# Allegro board SAPD2.brd
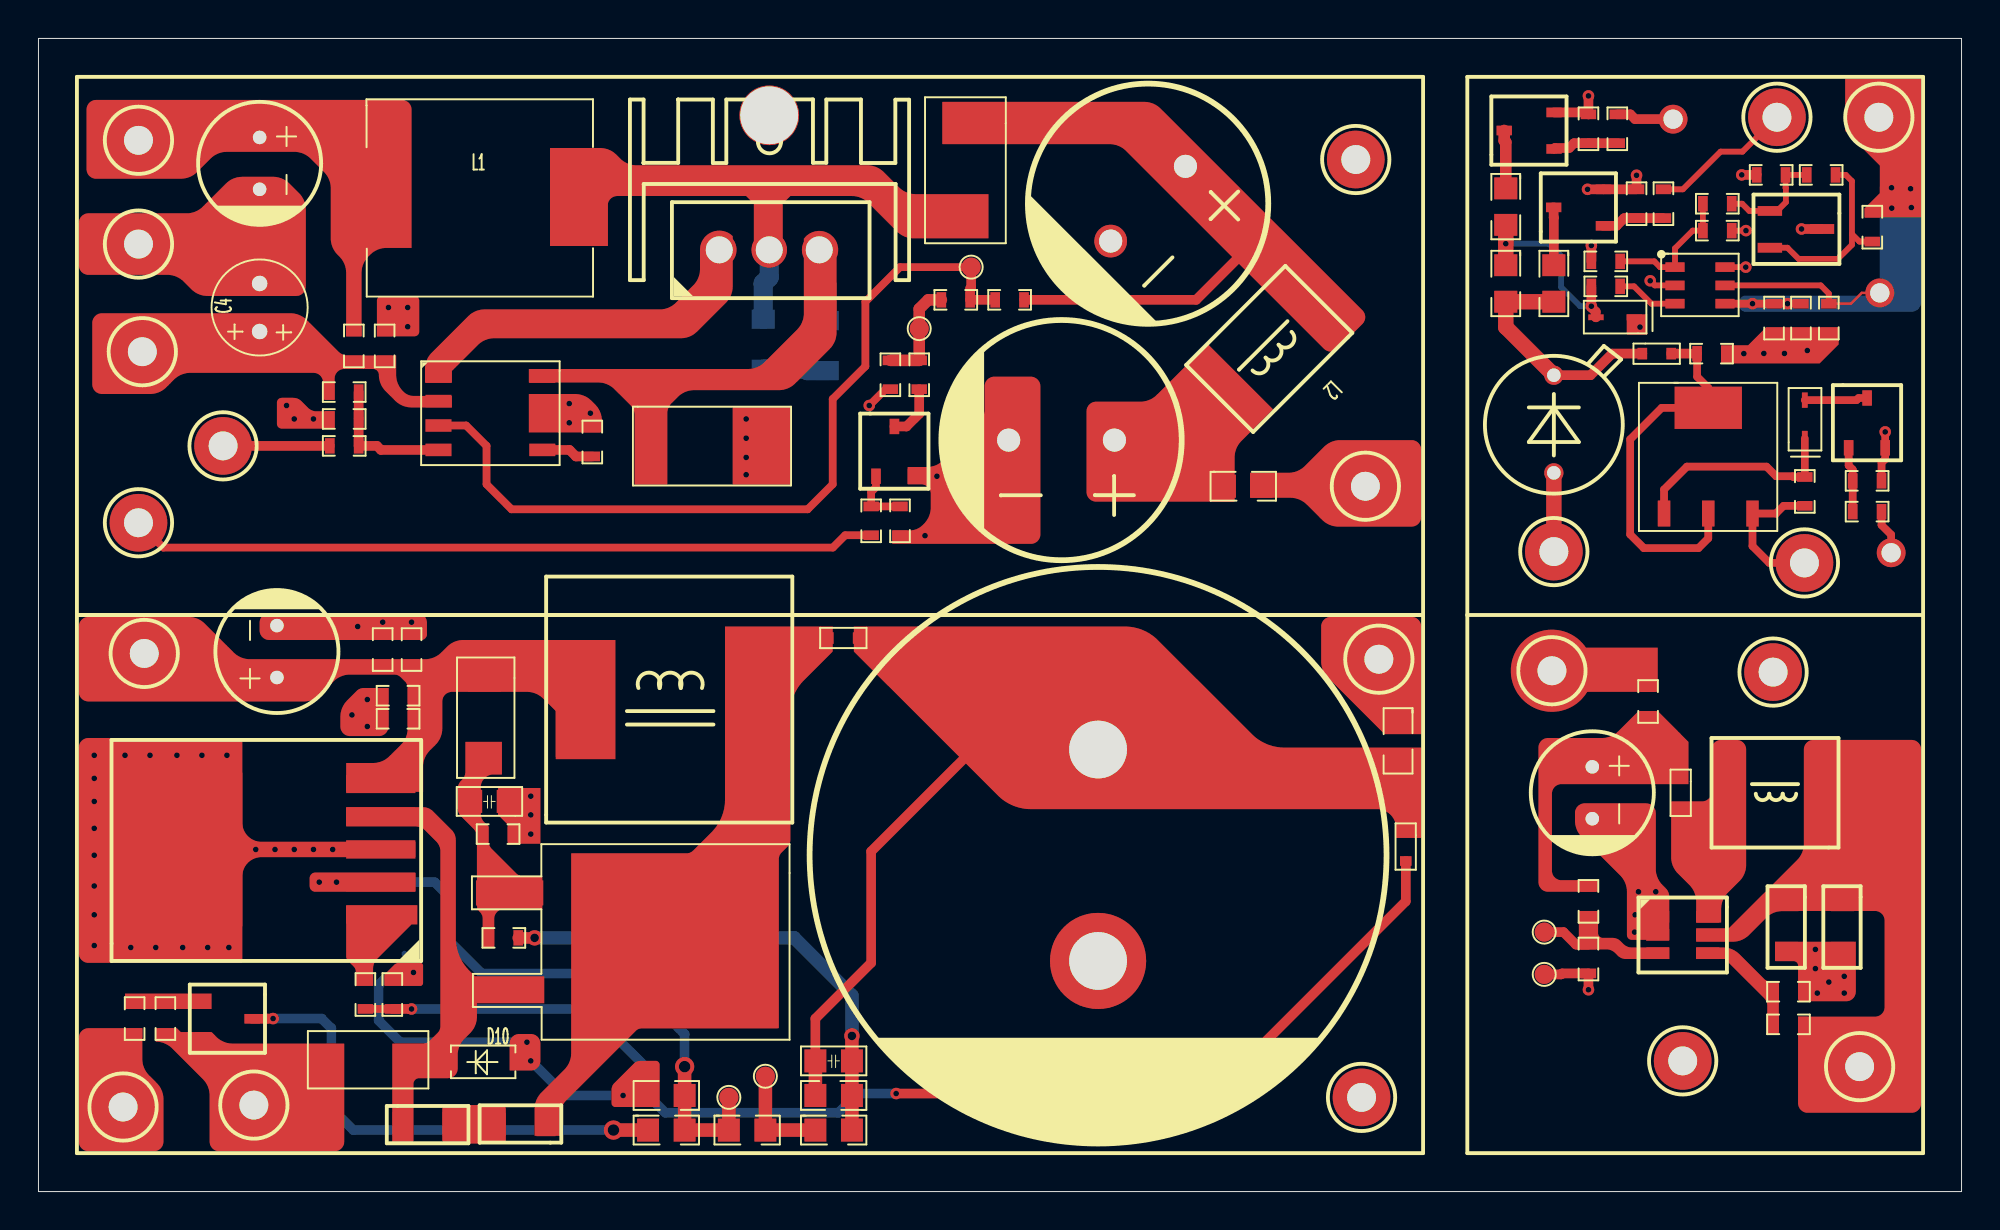
[diagram p0: board, top side]
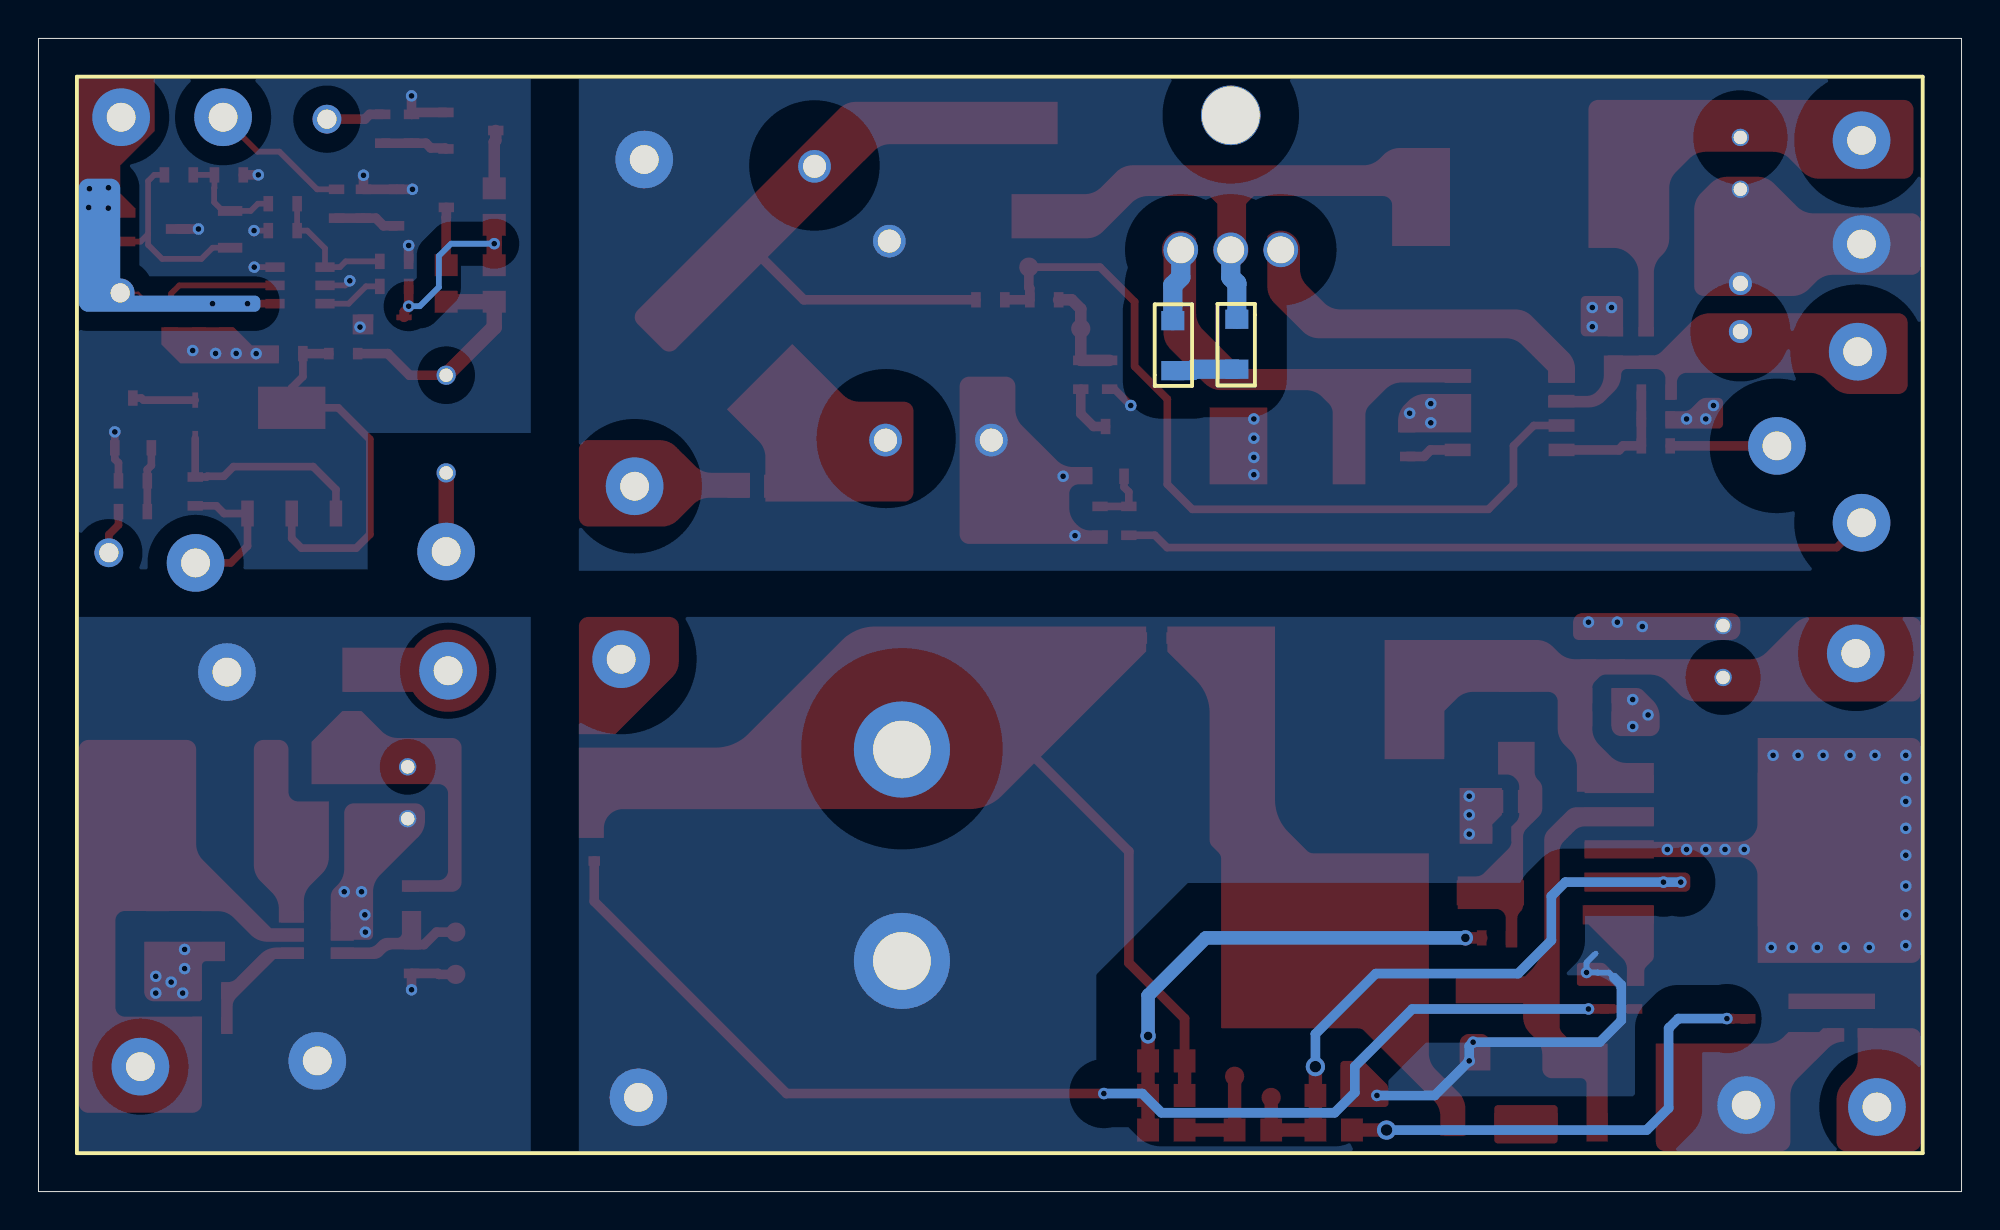
[diagram p1: board, bottom side, seen from below]

Outline 100 x 60 mm; copper layers: TOP, BOTTOM. Coordinates in mm from the lower left corner of the outline.
Outline path: 0,60 0,0 100,0 100,60 0,60

## Design rules (mm)
constraint set DEFAULT: min track width 0.127

## Placement (name value [footprint] x y rotation side)
C1  100uF/35V  [THR-CAP-6D3X11MM]  11.5 53.5 270 top
C2  22uF/250V  [CAP-D12D5XL16MM]  57.7 51.4 225 top
C3  0.1uF/16V  [C0603]  82.3 48.8 180 top
C4  10uF/35V  [CAP-D5XL11MM]  11.5 46 90 top
C5  0.1uF/16V  [C0603]  89.85 46.25 270 top
C6  10uF/16V  [C0603]  91.25 46.25 270 top
C7  0.1uF/35V  [C0603]  18.4 43.2 90 top
C8  22uF/250V  [CAP-D12D5XL16MM]  53.2 39.1 180 top
C9  0.1uF/35V  [C0603]  29.2 38.2 90 top
C10  0.1uF/35V  [C0603]  17.5 29 270 top
C11  1uF/35V  [C0603]  19.8 27.4 90 top
C12  100uF/35V  [THR-CAP-6D3X11MM]  12.4 28.1 90 top
C13  2.2uF/25V  [C0603]  19.5 26.2 180 top
C14  0.1uF/25V  [C0603]  17.9 24.2 0 top
C15  100uF/35V  [THR-CAP-6D3X11MM]  80.8 20.75 270 top
C16  10uF/35V  [C0805]  24.5 20.9 180 top
C17  0.1uF/35V  [C0603]  24.7 19 180 top
C18  1000uF/250V  [THR-CAP-D30XL40MM]  55.1 17.5 270 top
C19  10uF/35V  [C1210]  90.9 13.8 270 top
C20  10uF/35V  [C1210]  93.8 13.8 270 top
C21  1uF/35V  [C0603]  18.8 9.45 90 top
C22  DNP  [C0805]  42.4 7.4 180 top
C23  DNP  [R1210]  20.2 3.5 0 top
C24  DNP  [R1210]  41 44.01 90 bottom
D1  ES2F  [DO-214AA]  48.2 55.6 270 top
D2  PTVSLC3D3V3B  [SOD-323]  82 45.5 180 top
D3  BAS521  [SOD523]  83.4 43.6 0 top
D4  SAPD  [SAPD-THR-2P]  78.8 39.9 90 top
D5  BAS521  [SOD523]  42.6 28.8 180 top
D6  SS16  [DO-214AC]  23.2 24.7 270 top
D7  BAS521-7  [SOD523]  85.4 21.5 270 top
D8  BAS521  [SOD523]  71.1 18.7 270 top
D9  SS16  [DO-214AC]  17.1 6.8 0 top
D10  BZT52C30  [SOD123]  21.2 5.9 0 top
D11  MM3Z12VT1G  [SOD-323]  91.86 40.17 90 top
L1  100uH/2A  [IND-11D5X10X5MM]  17.8 51.7 0 top
L2  10uH/500mA  [SMD-6D8X4D5X3MM]  65.8 45.7 225 top
L3  33uH/3A  [SMD-CAP-12X12X8MM]  38.8 19.6 90 top
L4  47uH/1A  [SMD-IND-5X5MM]  90.3 20.7 180 top
NOREF  -  [unnamed]  38 56 0 top
NOREF#2  -  [#2]  0 60 0 top
NOREF#3  -  [#2]  0 0 90 top
Q1  FH3400C  [SOT-23]  77.53 55.2 90 top
Q2  IRF644PbF  [TO-220AB]  35.4 49 0 top
Q3  FH3400C  [SOT-23]  80.1 51.2 90 top
Q5  FH3400C  [SOT-23]  95.08 39.98 0 top
Q6  FH3400C  [SOT-23]  44.5 38.5 0 top
Q7  IRF840ASPbF  [D2PARK]  33.1 13 270 top
Q8  FH3400C  [SOT-23]  9.8 9 270 top
Q9  BSP316P  [SOT-223-3]  83.53 36.28 0 top
R1  10K  [R0603]  81 54.5 90 top
R2  100  [R0603]  81.7 56.1 270 top
R3  DNP  [R0603]  90.9 53.3 180 top
R4  0  [R0603]  93.5 53.3 180 top
R5  10K  [R0603]  83.5 50.6 90 top
R6  100  [R0603]  84.1 52.2 270 top
R7  4.99K  [R0603]  88.1 51.8 180 top
R8  4.7K  [R0805]  75.7 52.3 270 top
R9  499  [R0603]  94.96 50.98 270 top
R10  682  [R0603]  86.5 49.6 0 top
R11  332K  [R0805]  75.7 48.3 270 top
R12  0  [R0805]  78.2 48.3 270 top
R13  1K  [R0603]  82.3 47.5 180 top
R14  0  [R0603]  48.5 46.8 180 top
R15  1.5M  [R0603]  51.3 46.8 180 top
R16  10K  [R0603]  92.7 46.25 270 top
R17  DNP  [R0603]  16 44.8 270 top
R18  1M  [R0603]  87.8 44 180 top
R19  10K  [R0603]  43.9 43.3 270 top
R20  DNP  [R0603]  45.4 43.3 270 top
R21  DNP  [R0603]  15.1 41.2 0 top
R22  10K  [R0603]  92.25 35.63 90 top
R23  0  [R0603]  15.1 39.8 0 top
R24  DNP  [R0603]  15.1 38.4 0 top
R25  50m  [R2512]  31.9 38.8 0 top
R26  10K  [R0603]  94.29 36.58 0 top
R27  0  [R0805]  61.6 36.1 0 top
R28  100  [R0603]  95.89 35.78 180 top
R29  1K  [R0603]  43.7 34.1 90 top
R30  10K  [R0603]  44.4 35.7 270 top
R31  0  [R0603]  84.1 24.7 90 top
R32  300  [R0805]  70.1 24.5 270 top
R33  182K  [R0603]  80.2 15.9 270 top
R34  100K  [R0603]  25 13.6 180 top
R35  10K  [R0603]  80.2 12.9 270 top
R36  DNP  [R0603]  91.8 10.8 180 top
R37  1K  [R0603]  17.4 9.45 90 top
R38  1K  [R0603]  5.4 8.2 90 top
R39  10K  [R0603]  6.2 9.8 270 top
R40  10K  [R0603]  91.8 9.1 180 top
R41  5.36K  [R0805]  31.6 4.4 0 top
R42  1M  [R0805]  42.4 5.6 180 top
R43  DNP  [R1210]  25.1 3.5 180 top
R44  DNP  [R0805]  31.6 2.6 0 top
R45  0  [R0805]  35.8 2.6 0 top
R46  49.9K  [R0805]  40.3 2.6 0 top
R47  DNP  [R1210]  37.7 44.1 270 bottom
TP1  RESET  [TP_THR_CIR_3D0_1D5]  90.4 55.9 0 top
TP2  VDD5X  [TP_THR_CIR_3D0_1D5]  95.7 55.9 0 top
TP3  MODE  [TP_THR_CIR_1D0_1D5]  85 55.8 0 top
TP4  PWR_IN  [TP_THR_CIR_3D0_1D5]  5.2 54.7 0 top
TP5  HV1RET  [TP_THR_CIR_3D0_1D5]  68.5 53.7 0 top
TP6  GND  [TP_THR_CIR_3D0_1D5]  5.2 49.3 0 top
TP7  VR-1  [TP_SMD_1D0_NP]  48.5 48.1 0 top
TP8  VR-2  [TP_SMD_1D0_NP]  45.8 44.9 0 top
TP9  IC_PWR  [TP_THR_CIR_3D0_1D5]  5.4 43.7 0 top
TP10  SIGNAL  [TP_THR_CIR_1D0_1D5]  95.75 46.76 0 top
TP11  ENABLE  [TP_THR_CIR_3D0_1D5]  9.6 38.8 0 top
TP12  HV1  [TP_THR_CIR_3D0_1D5]  69 36.7 0 top
TP13  Vquench  [TP_THR_CIR_3D0_1D5]  91.83 32.71 0 top
TP14  LM_EN1  [TP_THR_CIR_3D0_1D5]  5.2 34.8 0 top
TP15  HVPS  [TP_THR_CIR_3D0_1D5]  78.8 33.3 0 top
TP16  QUENCH  [TP_THR_CIR_1D0_1D5]  96.34 33.24 0 top
TP17  VDDX  [TP_THR_CIR_3D0_1D5]  5.5 28 0 top
TP18  HV2  [TP_THR_CIR_3D0_1D5]  69.7 27.7 0 top
TP19  GND  [TP_THR_CIR_3D0_1D5]  90.2 27.03 0 top
TP20  Vquench  [TP_THR_CIR_3D0_1D5]  78.7 27.1 0 top
TP21  VR-1  [TP_SMD_1D0_NP]  78.3 13.5 0 top
TP22  VR-2  [TP_SMD_1D0_NP]  78.3 11.3 0 top
TP23  GND  [TP_THR_CIR_3D0_1D5]  85.5 6.8 0 top
TP24  5V~11V  [TP_THR_CIR_3D0_1D5]  94.7 6.5 0 top
TP25  VR-1  [TP_SMD_1D0_NP]  37.8 6 0 top
TP26  VR-2  [TP_SMD_1D0_NP]  35.9 4.9 0 top
TP27  GND  [TP_THR_CIR_3D0_1D5]  68.8 4.9 0 top
TP28  HV2RET  [TP_THR_CIR_3D0_1D5]  11.2 4.5 0 top
TP29  LM_EN2  [TP_THR_CIR_3D0_1D5]  4.4 4.4 0 top
U1  TL431  [SOT-23-3-TL431]  89.6 51.5 270 top
U2  TLV3501AIDBVR  [SOT-23-6]  85.1 48.1 0 top
U3  MAX1771ESA+  [SO-8]  26.2 42.4 270 top
U4  LT1172CQ#PBF  [DDPARK-5]  17.8 14.4 90 top
U5  MAX5026EUT-T  [SOT23-6]  85.5 13.4 270 top

## Library data of the parts
C1 C2 C8 C11-C13 C15 C18 C21 = C
C3-C7 C9 C10 C14 C16 C17 C19 C20 C22-C24 = CAP NP
D1 D3-D5 D7 D8 = DIODE
D2 = DIODE SCHOTTKY
D6 D9 = DIODE SCHOTTKY13_0
D10 D11 = DIODE ZENER
L1-L4 = INDUCTOR
Q1 Q3 Q5 Q6 Q8 = FH3400C
Q2 = IRF644PbF
Q7 = IRF840ASPbF
Q9 = BSP316P
R1-R47 = R
TP1-TP29 = T POINT F
U1 = TL431/TI
U2 = TLV3501AIDBVR
U3 = MAX1771ESA+
U4 = LT1172CQ#PBF
U5 = MAX5026EUT-T

## Footprints (pads in the part's own frame, mm; a bottom-side part is the same pattern mirrored in y, then rotated)
C0603
  rect 0.5x0.8 smd: 1(0.05,0.4) 2(1.55,0.4)
C0805
  rect 1.14x1.2 smd: 1(0.1,0.6) 2(2,0.6)
C1210
  rect 1x1.2 smd: 1(-1.289,0.015) 2(1.311,0.015)
CAP-D5XL11MM
  round 1.2 hole 0.8: 1(-1.25,0) 2(1.25,0)
CAP-D12D5XL16MM
  round 1.7 hole 1.2: 1(-2.75,0) 2(2.75,0)
D2PARK
  rect 1.3x3.5 smd: 1(-2.54,-8.6) 2(2.54,-8.6)
  rect 9x10.7 smd: 3(0,0)
DDPARK-5
  rect 0.95x3.6 smd: 1(0,0) 2(1.702,0) 3(3.404,0) 4(5.106,0) 5(6.808,0)
  rect 8x6 smd: 6(3.4,10.2)
DO-214AA
  rect 2.16x2.26 smd: 1(0,0) 2(4.9,0)
DO-214AC
  rect 1.575x1.67 smd: 1(-2.1,0) 2(2.17,-0.005)
IND-11D5X10X5MM
  rect 3x5 smd: 1(0,0) 2(10.3,0)
R0603
  rect 0.5x0.8 smd: 1(0.05,0.4) 2(1.55,0.4)
R0805
  rect 1.14x1.2 smd: 1(0.1,0.6) 2(2,0.6)
R1210
  rect 1x1.2 smd: 1(-1.289,0.015) 2(1.311,0.015)
R2512
  rect 1.5x3.7 smd: 1(0,0) 2(6.25,0)
SAPD-THR-2P
  round 1 hole 0.7: 1(-2.504,0) 2(2.576,0)
SMD-6D8X4D5X3MM
  rect 1x3 smd: 1(0,0) 2(5.2,0)
SMD-CAP-12X12X8MM
  rect 6x3 smd: 1(6,10.4) 2(6,1.6)
SMD-IND-5X5MM
  rect 1.25x4 smd: 1(-2.2,0) 2(2.2,0)
SO-8
  rect 0.65x1.35 smd: 1(0,-5.4) 2(1.27,-5.4) 3(2.54,-5.4) 4(3.81,-5.4) 5(3.81,0) 6(2.54,0) 7(1.27,0) 8(0,0)
SOD123
  rect 0.5x0.8 smd: 1(0.256,0.85) 2(3.614,0.85)
SOD523
  rect 0.5x0.6 smd: 1(0,0) 2(1.5,0)
SOD-323
  rect 0.8x0.3 smd: 1(-0.99,0.01) 2(1.01,0.01)
SOT23-6
  rect 0.6x1.2 smd: 1(-0.9,-1.3) 2(0.05,-1.3) 3(1,-1.3) 4(1,1.3) 5(0.05,1.3) 6(-0.9,1.3)
SOT-23
  rect 0.5x0.8 smd: 1(-0.95,-1.28) 2(0.95,-1.28) 3(0.01,1.31)
SOT-23-3-TL431
  rect 0.51x1.27 smd: 1(0.476,0.434) 2(1.415,3.142) 3(2.391,0.434)
SOT-23-6
  rect 1x0.5 smd: 1(0,0) 2(0,-0.95) 3(0,-1.9) 4(2.6,-1.9) 5(2.6,-0.95) 6(2.6,0)
SOT-223-3
  rect 0.65x1.35 smd: 1(1,-1) 2(3.3,-1) 3(5.6,-1)
  rect 3.5x2.2 smd: 4(3.3,4.5)
THR-CAP-6D3X11MM
  round 0.9 hole 0.7: 1(-1.35,0) 2(1.35,0)
THR-CAP-D30XL40MM
  round 5 hole 3: 1(-5.5,0) 2(5.5,0)
TO-220AB
  round 1.8 hole 1.4: 1(0,0) 2(2.6,0) 3(5.2,0)
TP_SMD_1D0_NP
  round 1 smd: 1(0,0)
TP_THR_CIR_1D0_1D5
  round 1.5 hole 1: 1(0,0)
TP_THR_CIR_3D0_1D5
  round 3 hole 1.5: 1(0,0)
unnamed
  round 3.1 hole 3 unplated: (0,0)

## Nets
15V_IN: C1.1 L1.1 R17.1 TP4.1(TP)
GND: C1.2 C2.2 C4.2 C7.2 C8.2 C9.2 Q6.2(S) R19.2 R23.1 R25.2 R30.2 TP5.1(TP) TP6.1(TP) U3.6 U3.7
GND_FIELD SIGNAL: C3.2 C5.2 C6.2 D2.1 Q1.2(S) Q3.2(S) Q5.2(S) R1.2 R3.2 R5.2 R10.2 R16.2 R18.1 R26.2 U1.2 U2.2(V-) U2.6
GND_QUENCH: C15.2 C19.2 C20.2 R35.2 R36.1 TP19.1(TP) TP22.1(TP) TP23.1(TP) U5.1 U5.2
GND_SIGNAL: C10.1 C11.2 C12.2 C13.2 C14.1 C16.1 C17.1 C18.2 C21.2 D9.1 D10.2 Q8.2(S) R39.2 R41.1 TP27.1(TP) TP28.1(TP) U4.3 U4.6
VDD5X: C5.1 C6.1 R9.1 TP2.1(TP) U2.4
VDDX: C10.2 C11.1 C12.1 C13.1 C14.2 D6.1 L3.1 TP17.1(TP) U4.5
EN: R24.1 TP11.1(TP)
GEIGER_MODE_EN: R2.1 TP3.1(TP)
LINEAR_MODE_EN1: R29.1 TP14.1(TP)
LINEAR_MODE_EN2: R38.1 TP29.1(TP)
QUENCH_VOLTAGE_DOWN: R28.1 TP16.1(TP)
RESET_DISCHARGE: R6.1 TP1.1(TP)
SIG: R16.1 TP10.1(TP) U2.5
SIGNAL_PULSE: D2.2(CATHODE) R8.2 R11.1 R13.2
VBIAS: C18.1 C22.2 D5.1(K) D8.1(K) R32.2 R42.2
VQUENCH: Q9.3(S) R22.1 TP13.1(TP)
N00177: Q2.1 U3.1
N00181: C24.2 Q2.3(S) R25.1 U3.8
N00224: D1.2 L1.2 Q2.2 R47.1
N00386: C4.1 C7.1 R17.2 R21.1 TP9.1(TP) U3.2(V+)
N00671: C9.1 U3.5
N01266: C2.1 D1.1(K) L2.1 R15.1
N01477: R14.1 R15.2 TP7.1(TP) U3.3
N01699: C8.1 L2.2 R27.1
N03183: R21.2 R23.2 R24.2 U3.4
N279067: R27.2 TP12.1(TP)
N281389: C24.1 R47.2
N284692: D5.2 L3.2 Q7.3 R43.1
N284752: C16.2 C17.2 D6.2(CATHODE) Q7.1 R34.2
N284970: C22.1 R34.1 R42.1 R46.2
N284990: C23.1 D9.2(CATHODE) D10.1(CATHODE) Q7.2(SOURCE) U4.4(VSW)
N285150: R45.2 R46.1 TP25.1(TP)
N285154: C21.1 D8.2 R37.1
N285468: R41.2 R44.2 R45.1 TP26.1(TP) U4.2
N287421: R14.2 R19.1 R20.1 TP8.1(TP)
N291281: C23.2 R43.2
N292831: Q8.3 R44.1
N293065: Q8.1 R38.2 R39.1
N293590: Q6.1 R29.2 R30.1
N294130: Q6.3 R20.2
N294230: R32.1 TP18.1(TP)
N295642: R37.2 U4.1
N298885: Q1.3 R8.1
N298922: Q1.1 R1.1 R2.2
N299116: D3.1(K) D4.2 R11.2 R12.2
N299256: Q3.1 R5.1 R6.2
N299321: Q3.3 R12.1
N300319: D3.2 Q9.2 Q9.4 R18.2
N301013: Q5.1 R26.1 R28.2
N302715: C19.1 C20.1 L4.1 R40.1 TP24.1(TP) U5.5(VCC)
N302737: D7.2 L4.2 U5.6
N302899: C15.1 D7.1(K) R31.1 R33.1
N302936: R33.2 R35.1 TP21.1(TP) U5.3
N303320: R36.2 R40.2 U5.4
N303862: R31.2 TP20.1(TP)
N306830: D11.1(CATHODE) Q9.1 R22.2
N312166: D4.1(K) TP15.1(TP)
N314013: R13.1 U2.3
N314083: C3.1 R7.2 R10.1 U2.1
N315595: R4.1 R9.2 U1.3
N315695: R3.1 R4.2 R7.1 U1.1(REF)
N320746: D11.2 Q5.3

## Via types
v1: diameter 0.6, hole 0.3, TOP to BOTTOM, 91 vias
v2: diameter 1, hole 0.6, TOP to BOTTOM, 2 vias
v3: diameter 0.8, hole 0.45, TOP to BOTTOM, 2 vias

## Routing (per net, layer and track width the routed paths; a pad name or vN(x,y) marks a point on that pad's centre or on a via; arc(x,y) is an arc through that point)
15V_IN: length 0.3
  TOP w0.4: 17.6,51.5 L1.1
GND: length 1.5
  TOP w0.4: v1(43.2,40.9) 44.05,41.75 R19.2
  vias: v1(12.9,40.9) v1(13.3,40.2) v1(14.3,40.2) v1(18.2,46) v1(19.2,46) v1(19.2,45) v1(27.6,41) v1(27.6,40) v1(28.7,40.5) v1(36.8,40.2) v1(36.8,39.2) v1(36.8,38.2) v1(36.8,37.3) v1(46.1,34.13) v1(46.72,37.22)
GND_FIELD SIGNAL: length 14.6
  TOP w0.3: U2.6 v1(88.78,48.1) ; U2.2 84.05,47.15 v1(83.81,47.39) ; R10.2 v1(88.79,50)
  TOP w0.4: v1(96.03,39.53) Q5.2 96.03,38.11 95.84,37.92 R26.2
  TOP w0.5: U1.2 v1(91.68,50.09) ; C3.2 v1(80.75,49.23) ; R3.2 v1(88.57,52.9) ; v1(80.6,57.01) R1.2 80.5,56.15 Q1.2 ; v1(80.55,52.15) Q3.2 R5.2 v1(83.1,52.88)
  vias: v1(83.28,44.98) v1(88.68,43.6) v1(89.72,43.61) v1(90.79,43.61) v1(91.98,43.76)
GND_QUENCH: length 3.2
  TOP w0.5: TP22.1 79.18,11.3 79.23,11.35 R35.2 v1(80.6,10.5)
  vias: v1(83.03,14.4) v1(83,13.5) v1(83.2,15.6) v1(84.1,15.6) v1(92.4,12.6) v1(92.4,11.6) v1(92.5,10.33) v1(93.1,10.9) v1(93.9,11.2) v1(93.9,10.33)
GND_SIGNAL: length 19.9
  BOTTOM w0.3: 19.03,12.38 19.5,11.91 v1(19.5,11.4) 18.92,11.4 18.91,11.39 18.33,11.39 18.07,11.13
  BOTTOM w0.5: 18.07,11.13 17.69,10.75 17.69,8.9 18.82,7.77 v1(25.4,7.77) 25.6,7.57 v1(25.6,6.8) 27.4,5 v1(30.4,5)
  vias: v1(2.9,22.7) v1(2.9,21.5) v1(2.9,20.3) v1(2.9,18.9) v1(2.9,17.5) v1(2.9,15.9) v1(2.9,14.4) v1(2.9,12.8) v1(4.5,22.7) v1(4.8,12.7) v1(5.8,22.7) v1(6.1,12.7) v1(7.2,22.7) v1(7.5,12.7) v1(8.5,22.7) v1(8.8,12.7) v1(9.8,22.7) v1(9.9,12.7) v1(11.3,17.8) v1(12.3,17.8) v1(13.3,17.8) v1(14.3,17.8) v1(15.3,17.8) v1(16.3,24.8) v1(16.6,29.4) v1(17.1,25.6) v1(17.1,24.2) v1(17.9,29.63) v1(19.4,29.63) v1(25.6,20.57) v1(25.6,19.6) v1(25.6,18.6)
VDD5X: length 4
  TOP w0.4: C6.1 v1(90.95,46.2) C5.1 v1(89.13,46.2) U2.4
  vias: v1(96.36,52.23) v1(96.37,51.17) v1(97.35,52.18) v1(97.39,51.2)
EN: length 5.6
  TOP w0.5: TP11.1 R24.1
GEIGER_MODE_EN: length 3
  TOP w0.5: TP3.1 83.03,55.8 82.78,56.05 R2.1
LINEAR_MODE_EN1: length 38.9
  TOP w0.4: TP14.1 6.49,33.51 41.31,33.51 41.95,34.15 R29.1
QUENCH_VOLTAGE_DOWN: length 2.3
  TOP w0.4: TP16.1 96.34,34.18 95.84,34.68 R28.1
RESET_DISCHARGE: length 7.5
  TOP w0.3: R6.1 85.51,52.15 87.47,54.11 88.61,54.11 TP1.1
SIG: length 9
  TOP w0.127: R16.1 94.25,46.2 94.81,46.76 TP10.1
  TOP w0.3: U2.5 92.68,47.15 93.1,46.73 R16.1
SIGNAL_PULSE: length 10.6
  TOP w0.5: D2.2 80.98,45.5 80.98,45.78 80.75,46.01 v1(80.75,46.07) R13.2
  TOP w0.8: R11.1 v1(76.3,49.32) R8.2
  BOTTOM w0.3: v1(76.3,49.32) 78.54,49.32 79.18,48.68 79.18,47.06 80.17,46.07 v1(80.75,46.07)
VBIAS: length 27.9
  TOP w0.5: C22.2 40.4,9 43.3,11.9 43.3,17.7 48.6,23 C18.1
  TOP w0.7: C22.2 R42.2
VQUENCH: length 7.6
  TOP w0.4: R22.1 90.75,35.68 90.35,35.28 Q9.3 89.13,33.58 90,32.71 TP13.1
N00181: length 3.9
  BOTTOM w1: Q2.3 40.6,47.57 41.02,47.16 C24.2
N00224: length 3.7
  BOTTOM w1: R47.1 37.69,47.26 38,47.57 Q2.2
N00671: length 2.7
  TOP w0.5: U3.5 27.61,38.59 27.95,38.25 C9.1
N01266: length 12.4
  TOP w0.5: 62.65,48.85 60.2,46.4 R15.1
N01477: length 43.5
  TOP w0.4: U3.3 22.24,39.86 23.3,38.8 23.3,36.8 24.6,35.5 40,35.5 41.3,36.8 41.3,41.24 43,42.94 43,46.3 44.8,48.1 TP7.1
  TOP w0.5: R15.2 R14.1 48.45,46.99 48.5,47.04 TP7.1
N03183: length 7
  TOP w0.5: R21.2 R23.2 R24.2 17.6,38.8 17.81,38.59 U3.4
N281389: length 3.4
  BOTTOM w1: C24.1 39.99,42.72 39.91,42.79 R47.2
N284970: length 25.6
  TOP w0.6: R34.1 v3(25.8,13.2)
  TOP w0.7: R46.2 R42.1 C22.1 v3(42.3,8.1)
  BOTTOM w0.7: v3(25.8,13.2) 39.3,13.2 42.3,10.2 v3(42.3,8.1)
N285150: length 5.4
  TOP w0.7: R46.1 R45.2 TP25.1
N285154: length 63.8
  TOP w0.4: C21.1 R37.1
  TOP w0.5: v1(19.4,9.5) 19.3,9.5 19.3,9.5 C21.1 ; v1(44.6,5.1) 61.1,5.1 71.1,15.1 D8.2
  BOTTOM w0.5: v1(19.4,9.5) 28.56,9.5 31.55,6.51 31.55,5.15 32.6,4.1 41.6,4.1 42.6,5.1 v1(44.6,5.1)
N285468: length 32.6
  TOP w0.7: TP26.1 R45.1 R44.2 R41.2 v2(33.6,6.5)
  BOTTOM w0.5: v1(14.6,16.1) v1(15.5,16.1) 20.6,16.1 21.33,15.37 21.33,13.07 23.06,11.34 30.46,11.34 33.6,8.2 v2(33.6,6.5)
N287421: length 5.5
  TOP w0.6: R14.2 46.27,46.4 45.8,45.93 TP8.1 R20.1 R19.1
N292831: length 25.4
  TOP w0.5: v1(12.2,9) 11.9,9 11.89,8.99 Q8.3
  TOP w0.7: v2(29.9,3.2) R44.1
  BOTTOM w0.5: v1(12.2,9) 14.73,9 15.23,8.5 15.23,4.34 16.37,3.2 v2(29.9,3.2)
N293590: length 3.2
  TOP w0.4: Q6.1 43.55,36.65 43.3,36.4 R29.2 R30.1
N294130: length 2.8
  TOP w0.5: R20.2 45.8,40.47 45.14,39.81 Q6.3
N298885: length 3
  TOP w0.6: R8.1 76.3,54.6 76.22,54.68 Q1.3
N298922: length 3.4
  TOP w0.5: R2.2 R1.1 79.85,54.55 79.6,54.3 78.86,54.3 Q1.1
N299116: length 12.4
  TOP w0.5: D4.2 80.71,42.48 81.83,43.6 D3.1
  TOP w0.8: D4.2 76.3,44.98 R11.2 R12.2
N299256: length 3.3
  TOP w0.5: Q3.1 82.06,50.25 82.46,50.65 R5.1 R6.2
N299321: length 3
  TOP w0.5: R12.1 78.8,50.67 78.79,50.68 Q3.3
N300319: length 20
  TOP w0.4: R18.2 86.25,42.4 86.83,41.82 Q9.4 84.41,40.78 82.77,39.14 82.77,34.19 83.48,33.48 86.32,33.48 86.83,33.99 Q9.2
  TOP w0.5: D3.2 R18.2
N301013: length 3.4
  TOP w0.4: Q5.1 94.13,37.78 94.34,37.57 R26.1 R28.2
N302936: length 2.6
  TOP w0.5: R35.1 79.95,12.85 79.3,13.5 TP21.1
N306830: length 11.3
  TOP w0.4: D11.1 R22.2 91.26,37.18 91.22,37.22 90.36,37.22 89.86,37.72 85.72,37.72 84.53,36.53 Q9.1
N312166: length 4.1
  TOP w0.8: TP15.1 D4.1
N314013: length 3.2
  TOP w0.3: U2.3 83.87,46.2 82.97,47.1 R13.1
N314083: length 7.2
  TOP w0.3: R7.2 R10.1 86.02,50 85.1,49.08 U2.1 84.32,48.1 84.02,48.4 C3.1
N315595: length 10.3
  TOP w0.3: R9.2 94.69,49.43 94.3,49.82 ; U1.3 90.95,49.11 91.53,48.53 93.57,48.53 94.3,49.26 94.3,49.82 ; 94.3,49.82 94.3,52.58 93.98,52.9 R4.1
N315695: length 5.7
  TOP w0.3: R4.2 R3.1 90.85,52.22 90.86,52.21 90.86,51.47 90.41,51.02 U1.1 88.97,51.02 88.59,51.4 R7.1
N320746: length 3.3
  TOP w0.4: Q5.3 94.65,41.29 94.54,41.18 D11.2

## Copper pours and planes (outline as drawn; the poured copper is in the pictures)
15V_IN on TOP (solid shape): 18.9,56.8 19.25,56.65 19.4,56.3 19.4,49.1 18.1,49.1 17.64,49.01 17.25,48.75 17.15,48.65 16.89,48.26 16.8,47.8 16.8,44.5 16,44.5 16,47.8 15.91,48.26 15.65,48.65 15.55,48.75 15.29,49.14 15.2,49.6 15.2,52.2 15.11,52.66 14.85,53.05 14.15,53.75 13.76,54.01 13.3,54.1 9.8,54.1 9.34,54.01 8.95,53.75 8.25,53.05 7.86,52.79 7.4,52.7 3,52.7 2.65,52.85 2.5,53.2 2.5,56.3 2.65,56.65 3,56.8
GND on TOP (solid shape): 39.1,36.8 36.1,36.8 36.1,40.8 39.1,40.8
GND on TOP (solid shape): 27.9,41.5 28.36,41.41 28.75,41.15 28.95,40.95 29.21,40.56 29.3,40.1 29.3,39.5 25.5,39.5 25.5,41.5
GND on TOP (solid shape): 51.6,42.4 51.95,42.25 52.1,41.9 52.1,34.2 51.95,33.85 51.6,33.7 44.4,33.7 44.4,34.4 45.3,34.4 45.67,34.47 45.98,34.68 46.05,34.75 46.31,35.14 46.4,35.6 46.4,36.3 46.25,36.65 45.9,36.8 45.2,36.8 45.2,37.7 46.2,37.7 46.66,37.79 47.05,38.05 48.85,39.85 49.11,40.24 49.2,40.7 49.2,41.9 49.35,42.25 49.7,42.4
GND on BOTTOM: 2.1,57.9 2.1,32.3 71.9,32.3 71.9,57.9 ; 5 cut-outs
GND_FIELD SIGNAL on TOP (solid shape): 83.66,44.6 82.59,44.6 82.59,45.64 83.66,45.64
GND_FIELD SIGNAL on TOP (solid shape): 93.61,44.08 92.62,43.09 87.5,43.09 87.5,44.03 88.9,44.03 89.84,44.97 93.61,44.97
GND_FIELD SIGNAL on BOTTOM: 74.4,57.9 97.9,57.9 97.9,32.37 82.88,32.37 82.88,39.47 74.4,39.47
GND_QUENCH on TOP (solid shape): 94.5,10.4 94.35,10.05 94,9.9 91.6,9.9 91.5,10 91.5,11.75 91.43,11.93 91.25,12 90.3,12 90.3,13 94.5,13
GND_QUENCH on BOTTOM: 74.4,29.9 74.4,2.1 97.9,2.1 97.9,29.9
GND_SIGNAL on TOP (solid shape): 26.1,18.1 24.4,18.1 24.4,19.1 23.9,19.6 23.9,21 26.1,21
GND_SIGNAL on TOP (solid shape): 7.4,8.3 9,8.3 9.25,8.05 9.64,7.79 10.1,7.7 15.9,7.7 15.9,2.6 15.75,2.25 15.4,2.1 9.4,2.1 9.05,2.25 8.9,2.6 8.9,5 8.81,5.46 8.55,5.85 6.95,7.45 6.56,7.71 6.1,7.8 6.1,8.5 7.2,8.5
GND_SIGNAL on TOP (solid shape): 10.6,19.2 10.89,18.49 11.6,18.2 19.6,18.2 19.6,17.4 11.6,17.4 10.89,17.11 10.6,16.4 10.6,11.9 2.6,11.9 2.25,12.05 2.1,12.4 2.1,23.1 2.25,23.45 2.6,23.6 10.6,23.6
GND_SIGNAL on BOTTOM: 2.1,29.9 66.44,29.9 65.94,28.86 65.78,27.72 66.92,24.94 69.7,23.8 70.85,23.97 71.9,24.47 71.9,2.1 2.1,2.1 ; 2 cut-outs
VDD5X on TOP (solid shape): 97.9,50.69 94.97,50.69 94.97,51.17 95.75,51.95 95.75,53.39 93.95,55.19 93.95,57.9 97.9,57.9
VDDX on TOP (solid shape): 7.8,29.9 8.26,29.81 8.65,29.55 10.15,28.05 10.54,27.79 11,27.7 20.1,27.7 20.56,27.79 20.95,28.05 21.25,28.35 21.64,28.61 22.1,28.7 30,28.7 30,22.5 26.9,22.5 26.9,25 26.25,25.65 25.86,25.91 25.4,26 21.5,26 21.15,25.85 21,25.5 21,24.1 20.91,23.64 20.65,23.25 20.35,22.95 20.09,22.56 20,22.1 20,20.8 16,20.8 16,22.3 17.4,22.3 17.86,22.39 18.25,22.65 18.85,23.25 19.11,23.64 19.2,24.1 19.2,26.2 19.16,26.38 19.06,26.54 18.84,26.76 18.68,26.86 18.5,26.9 16.2,26.9 15.74,26.81 15.35,26.55 14.65,25.85 14.26,25.59 13.8,25.5 2.6,25.5 2.25,25.65 2.1,26 2.1,29.4 2.25,29.75 2.6,29.9
VBIAS on TOP (solid shape): 56.5,29.4 57.42,29.22 58.21,28.69 63.09,23.81 63.88,23.28 64.8,23.1 71.9,23.1 71.9,18.4 70.6,18.4 70.6,18.9 70.31,19.61 69.6,19.9 51.6,19.9 50.68,20.08 49.89,20.61 42.4,28.1 42.4,29.4
N00181 on TOP (solid shape): 39.8,49.57 40.9,49.94 41.58,49 41.56,48.8 41.5,48.6 41.5,44.7 41.41,44.24 41.15,43.85 39.35,42.05 38.96,41.79 38.5,41.7 34.1,41.7 33.64,41.61 33.25,41.35 32.91,41.01 32.76,40.78 32.7,40.5 32.7,36.8 31,36.8 31,40.4 30.94,40.68 30.79,40.91 29.95,41.75 29.56,42.01 29.1,42.1 25.5,42.1 25.5,42.8 36.9,42.8 37.36,42.89 37.75,43.15 39.45,44.85 39.71,45.24 39.8,45.7
N00224 on TOP (solid shape): 29.2,54.3 29.66,54.21 30.05,53.95 30.25,53.75 30.64,53.49 31.1,53.4 43.1,53.4 43.56,53.31 43.95,53.05 44.75,52.25 45.14,51.99 45.6,51.9 49.4,51.9 49.4,49.6 45.5,49.6 45.04,49.69 44.65,49.95 43.15,51.45 42.76,51.71 42.3,51.8 39.1,51.8 38.7,51.4 38.7,49.6 38.86,49.32 38.92,49 38,48.08 37.08,49 37.11,49.24 37.2,49.46 37.2,51.4 36.8,51.8 30.1,51.8 29.75,51.65 29.6,51.3 29.6,49.2 26.6,49.2 26.6,54.3
N00386 on TOP (solid shape): 13.1,45.7 13.56,45.61 13.95,45.35 15.59,43.71 15.82,43.56 16.1,43.5 18.6,43.5 18.6,42.5 18.69,42.04 18.95,41.65 18.99,41.61 19.22,41.46 19.5,41.4 21.5,41.4 21.5,40.8 19.4,40.8 18.94,40.89 18.55,41.15 18.05,41.65 17.79,42.04 17.7,42.5 17.61,42.71 17.4,42.8 15.9,42.8 15.55,42.65 15.4,42.3 15.4,41.2 14.8,41.2 14.8,42.1 14.65,42.45 14.3,42.6 7.9,42.6 7.44,42.51 7.05,42.25 6.65,41.85 6.26,41.59 5.8,41.5 3.3,41.5 2.95,41.65 2.8,42 2.8,45.2 2.95,45.55 3.3,45.7
N01699 on TOP (solid shape): 64.2,40.7 62.55,39.05 62.29,38.66 62.2,38.2 62.2,35.9 55,35.9 54.65,36.05 54.5,36.4 54.5,40.6 54.65,40.95 55,41.1 57.3,41.1 57.76,41.19 58.15,41.45 60.8,44.1
N284692 on TOP (solid shape): 41.3,28.1 39.81,26.61 39.28,25.82 39.1,24.9 39.1,18.3 39.06,18.12 38.96,17.96 38.64,17.64 38.54,17.48 38.5,17.3 38.5,8.5 31.4,8.5 31.22,8.46 31.06,8.36 27.45,4.75 27.19,4.36 27.1,3.9 27.1,2.9 25.8,2.9 25.8,4.3 25.89,4.76 26.15,5.15 27.35,6.35 27.61,6.74 27.7,7.2 27.7,17.6 33.7,17.6 33.88,17.64 34.04,17.74 34.99,18.69 35.52,19.48 35.7,20.4 35.7,29.4 41.3,29.4
N284752 on TOP (solid shape): 24.1,21.7 23.65,21.7 23.42,21.65 23.22,21.52 23.18,21.48 23.05,21.28 23,21.05 23,19.65 23.05,19.42 23.18,19.22 23.4,19 23.4,18.25 23.45,18.02 23.58,17.82 24.82,16.58 25.02,16.45 25.25,16.4 26.2,16.4 26.2,14.7 24.2,14.7 24.02,14.66 23.86,14.56 23.84,14.54 23.74,14.38 23.7,14.2 23.7,12.7 23.1,12.7 23.1,14.2 23.06,14.38 22.96,14.54 22.94,14.56 22.84,14.72 22.8,14.9 22.8,18.45 22.75,18.68 22.62,18.88 21.98,19.52 21.85,19.72 21.8,19.95 21.8,20.95 21.85,21.18 21.98,21.38 22.02,21.42 22.15,21.62 22.2,21.85 22.2,23.4 24.1,23.4
N284990 on TOP (solid shape): 20,20 20.28,19.94 20.51,19.79 21.49,18.81 21.64,18.58 21.7,18.3 21.7,13.2 21.88,12.28 22.41,11.49 22.7,11.2 26.3,11.2 26.3,9.8 22.8,9.8 22.8,9.1 22.71,8.64 22.45,8.25 22.15,7.95 21.89,7.56 21.8,7.1 21.8,6.4 21.65,6.05 21.3,5.9 19.8,5.9 19.59,5.81 19.5,5.6 19.5,2.6 18.4,2.6 18.4,7.7 20,7.7 20.18,7.74 20.34,7.84 20.76,8.26 20.86,8.42 20.9,8.6 20.9,17.7 20.84,17.98 20.69,18.21 20.11,18.79 19.88,18.94 19.6,19 16,19 16,20
N293065 on TOP (solid shape): 9,9.5 4.5,9.5 4.5,10.3 9,10.3
N295642 on TOP (solid shape): 19.7,13.9 19.4,13.9 17.61,12.11 17.46,11.88 17.4,11.6 17.4,10.7 16.5,10.7 16.5,11.45 16.47,11.59 16.39,11.71 16.11,11.99 16.03,12.11 16,12.25 16,14.9 19.7,14.9
N302715 on TOP (solid shape): 97.4,23.5 97.75,23.35 97.9,23 97.9,4.6 97.75,4.25 97.4,4.1 92,4.1 91.65,4.25 91.5,4.6 91.5,9.1 95.5,9.1 95.85,9.25 96,9.6 96,14.1 95.85,14.45 95.5,14.6 90.7,14.6 90.24,14.51 89.85,14.25 88.95,13.35 88.56,13.09 88.1,13 86.2,13 86.2,13.7 87.9,13.7 91.45,17.25 91.71,17.64 91.8,18.1 91.8,23 91.95,23.35 92.3,23.5
N302737 on TOP (solid shape): 88.3,23.5 88.65,23.35 88.8,23 88.8,17 88.71,16.54 88.45,16.15 87.85,15.55 87.59,15.16 87.5,14.7 87.5,14 86.2,14 86.2,15.1 86.11,15.56 85.85,15.95 85.25,16.55 84.99,16.94 84.9,17.4 84.9,20.3 86.5,20.3 86.85,20.45 87,20.8 87,23 87.15,23.35 87.5,23.5
N302899 on TOP (solid shape): 85.8,23.4 85.8,21.2 79.2,21.2 78.85,21.05 78.7,20.7 78.7,16.7 78.85,16.35 79.2,16.2 81.1,16.2 81.1,15.6 78.5,15.6 78.15,15.75 78,16.1 78,23.1 78.15,23.45 78.5,23.6 81.3,23.6 81.76,23.69 82.15,23.95 83.2,25 84.2,25
N302936 on TOP (solid shape): 81.1,13.45 81.17,13.27 81.35,13.2 81.85,13.2 82.08,13.15 82.28,13.02 82.42,12.88 82.62,12.75 82.85,12.7 84.8,12.7 84.8,12.1 82.55,12.1 82.32,12.15 82.12,12.28 81.98,12.42 81.78,12.55 81.55,12.6 80.1,12.6 80.1,14.6 81.1,14.6
N303320 on TOP (solid shape): 87.6,12.7 88.06,12.61 88.45,12.35 89.72,11.08 89.92,10.95 90.15,10.9 90.5,10.9 90.5,8.2 89.9,8.2 89.9,9.65 89.85,9.88 89.72,10.08 87.7,12.1 86.2,12.1 86.2,12.7
GND on TOP (solid shape): 19.55,46.6 19.73,46.53 19.8,46.35 19.8,44.75 19.73,44.57 19.55,44.5 17.6,44.5 17.6,46.35 17.67,46.53 17.85,46.6
GND on TOP (solid shape): 13.25,41.3 13.48,41.25 13.68,41.12 14.02,40.78 14.22,40.65 14.45,40.6 15.4,40.6 15.4,39.7 12.65,39.7 12.47,39.77 12.4,39.95 12.4,41.05 12.47,41.23 12.65,41.3
GND on TOP (solid shape): 12.2,52.8 12.66,52.71 13.05,52.45 13.55,51.95 13.81,51.56 13.9,51.1 13.9,47.1 13.75,46.75 13.4,46.6 8.8,46.6 8.34,46.69 7.95,46.95 7.55,47.35 7.16,47.61 6.7,47.7 2.6,47.7 2.25,47.85 2.1,48.2 2.1,50.4 2.25,50.75 2.6,50.9 7.7,50.9 8.16,50.99 8.55,51.25 9.75,52.45 10.14,52.71 10.6,52.8
GND_QUENCH on TOP (solid shape): 83.6,20.2 83.95,20.05 84.1,19.7 84.1,16.8 84.19,16.34 84.45,15.95 84.62,15.78 84.75,15.58 84.8,15.35 84.8,13.1 82.85,13.1 82.67,13.17 82.6,13.35 82.6,15.6 82.51,16.06 82.25,16.45 80.25,18.45 79.99,18.84 79.9,19.3 79.9,19.7 80.05,20.05 80.4,20.2
GND_SIGNAL on TOP (solid shape): 19.85,11.9 19.96,11.86 20,11.75 20,10.85 19.96,10.74 19.85,10.7 18,10.7 18,11.3 18.49,11.79 18.61,11.87 18.75,11.9
GND_SIGNAL on TOP (solid shape): 32.1,6.8 32.24,6.74 32.3,6.6 32.3,4.4 30,4.4 29.86,4.46 29.8,4.6 29.8,5.3 29.84,5.48 29.94,5.64 30.96,6.66 31.12,6.76 31.3,6.8
GND_SIGNAL on TOP (solid shape): 25.6,8.2 25.95,8.05 26.1,7.7 26.1,6.8 25.95,6.45 25.6,6.3 24.5,6.3 24.5,7.7 24.65,8.05 25,8.2
GND_SIGNAL on TOP (solid shape): 18.2,24.2 18.05,23.85 17.7,23.7 16.2,23.7 15.85,23.85 15.7,24.2 15.7,24.7 15.79,25.16 16.05,25.55 16.56,26.06 16.72,26.16 16.9,26.2 18.2,26.2
GND_SIGNAL on TOP (solid shape): 19.7,30.1 20.05,29.95 20.2,29.6 20.2,29 20.11,28.79 19.9,28.7 12,28.7 11.65,28.85 11.5,29.2 11.5,29.6 11.65,29.95 12,30.1
VDD5X on BOTTOM (solid shape): 97.4,52.7 97.75,52.55 97.9,52.2 97.9,46.28 97.75,45.93 97.4,45.78 88.76,45.78 88.55,45.87 88.46,46.08 88.46,46.32 88.55,46.53 88.76,46.62 95.25,46.62 95.6,46.77 95.75,47.12 95.75,52.2 95.9,52.55 96.25,52.7
LINEAR_MODE_EN2 on TOP (solid shape): 5.4,6.9 5.49,6.44 5.75,6.05 6.15,5.65 6.41,5.26 6.5,4.8 6.5,2.6 6.35,2.25 6,2.1 2.6,2.1 2.25,2.25 2.1,2.6 2.1,8 2.25,8.35 2.6,8.5 5.4,8.5
N00177 on TOP (solid shape): 34.4,49 35.01,49.92 36.1,49.71 36.1,47.1 36.01,46.64 35.75,46.25 34.25,44.75 33.86,44.49 33.4,44.4 23.7,44.4 23.24,44.31 22.85,44.05 21.5,42.7 21.5,42.1 20.1,42.1 20.1,42.8 20.19,43.26 20.45,43.65 22.35,45.55 22.74,45.81 23.2,45.9 32.3,45.9 32.76,45.99 33.15,46.25 34.05,47.15 34.31,47.54 34.4,48
N01266 on TOP (solid shape): 57.5,56.7 57.96,56.61 58.35,56.35 68.85,45.85 68.99,45.5 68.85,45.15 67.55,43.85 67.2,43.71 66.85,43.85 56.55,54.15 56.16,54.41 55.7,54.5 47,54.5 47,56.7
N279067 on TOP (solid shape): 71.4,39.1 71.75,38.95 71.9,38.6 71.9,35.1 71.75,34.75 71.4,34.6 67.6,34.6 67.14,34.69 66.75,34.95 65.95,35.75 65.56,36.01 65.1,36.1 63,36.1 63,37.4 65,37.4 65.46,37.49 65.85,37.75 66.85,38.75 67.24,39.01 67.7,39.1
N285468 on TOP (solid shape): 19.6,15.6 14.4,15.6 14.19,15.69 14.1,15.9 14.1,16.3 14.19,16.51 14.4,16.6 19.6,16.6
N291281 on TOP (solid shape): 24.1,4.5 24.24,4.44 24.3,4.3 24.3,2.7 24.24,2.56 24.1,2.5 21.2,2.5 21.06,2.56 21,2.7 21,4.3 21.06,4.44 21.2,4.5
N294230 on TOP (solid shape): 71.4,29.9 71.75,29.75 71.9,29.4 71.9,23.8 70,23.8 67.05,26.75 66.79,27.14 66.7,27.6 66.7,29.4 66.85,29.75 67.2,29.9
N303862 on TOP (solid shape): 79.7,28.99 80.47,28.3 84.2,28.3 84.2,26 80.53,26 79.75,25.24 78.7,24.96 76.56,27.1 78.7,29.24

## Text on the board
DIMENSION: FIGURE | FINISHED_SIZE | 0.3 | 0.45 | 0.6 | 0.7 | 0.8 | 1.0 | 1.2 | 1.4 | 1.5 | 3.0 | DRILL CHART: TOP to BOTTOM | ALL UNITS ARE IN MILLIMETERS | PLATED | NON-PLATED | QTY | 91 | 2 | 8 | 3 | 4 | 20 | 1
